# EAGLE board Ambulance (EAGLE 7.6.0)
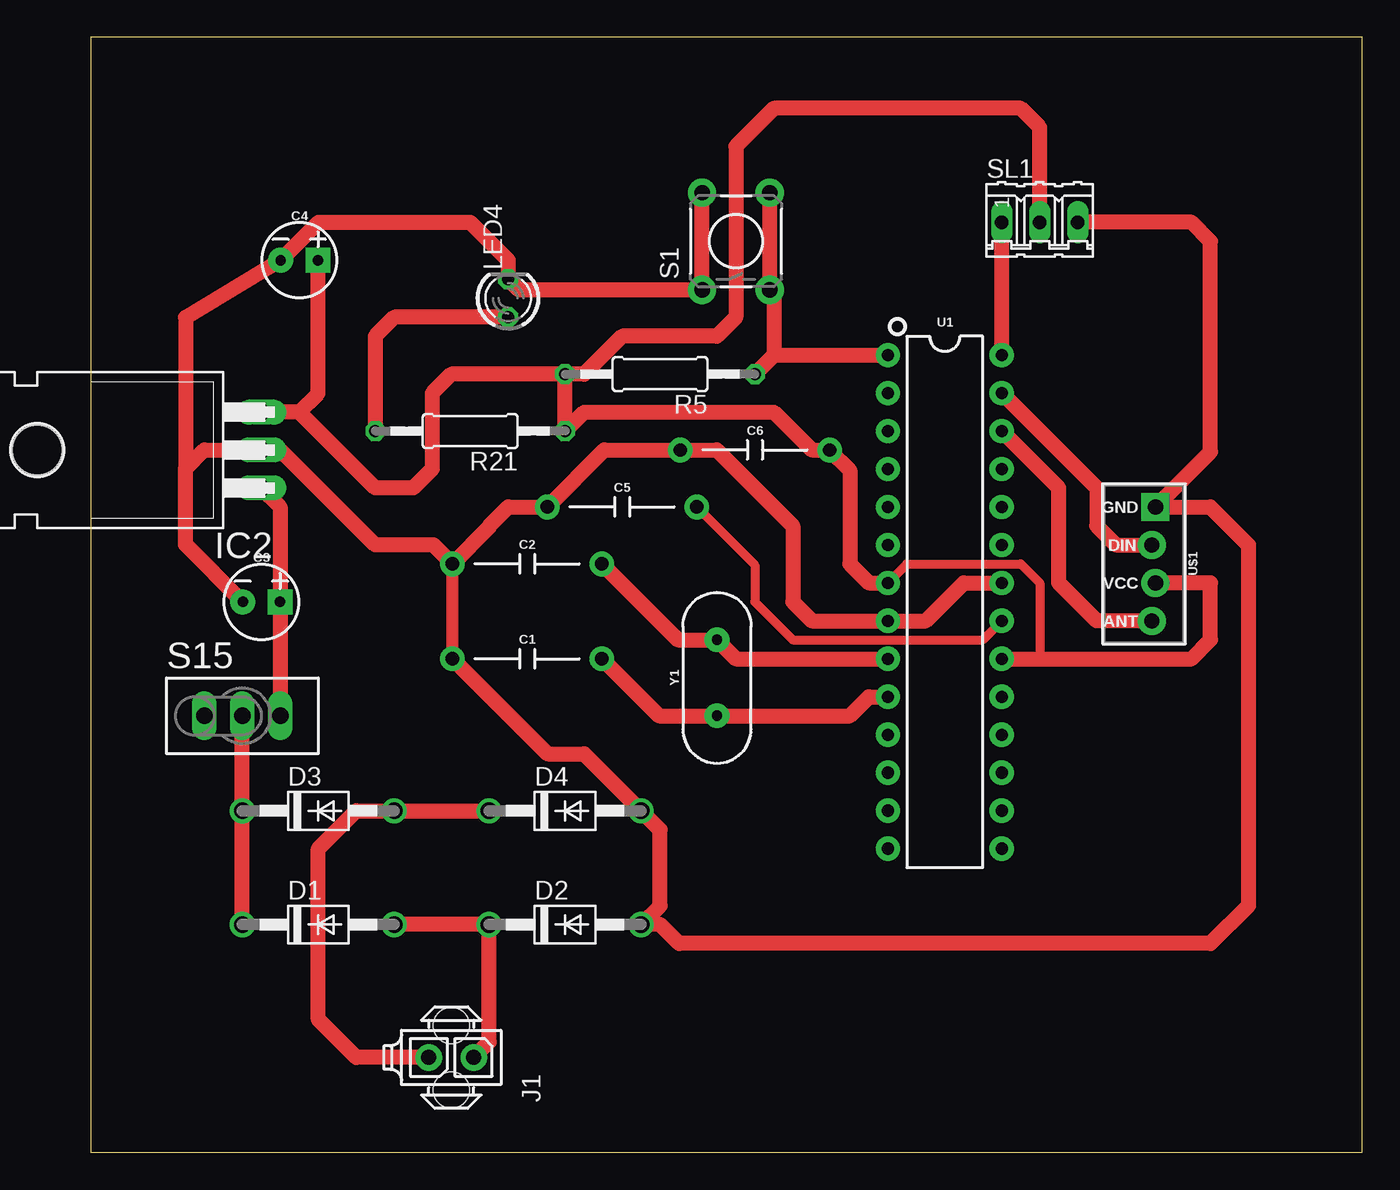
[diagram p0: board, top side]

Size 85.07 x 74.6 mm. Coordinates in mm from the lower left corner, seen from the top.
Outline: 0,0 85.07,0 85.07,74.6 0,74.6 0,0
Copper layers (1*16): Top 0.035mm / dielectric 1.5mm / Bottom 0.035mm
Design rules "default": minimum track width 10mil, minimum drill 24mil, track to track 8mil, track to pad 8mil, pad to pad 8mil, via to via 8mil, smd to smd 8mil, copper to edge 40mil, drill to drill 8mil, minimum pad ring 10mil, minimum via ring 8mil, stop-mask expansion 4mil, vias tented up to drill 0mil, thermal gap 10mil

## Footprints (pad centres in the part's own frame; a part is rotated, then mirrored left to right if it is on the bottom)
CAP-PTH-10MM = drill 0.9 pad 1.651: 1 -5,0; 2 5,0
CPOL-RADIAL-2.5MM-5MM-KIT = drill 0.7 pad 1.651 square: 1 1.25,0 | drill 0.7 pad 1.651: 2 -1.25,0
DO41-10 = drill 1.118: A 5.08,0; C -5.08,0
TO220H = drill 1.118 long: 1 -2.54,-10.16; 2 0,-10.16; 3 2.54,-10.16 | hole 3.302: 0,4.826
794681-2 = drill 1 pad 1.778: 1 0,-1.5; 2 0,1.5 | hole 2.4: 2.13,0; -2.17,0
LED3MM = drill 0.813 octagon: A -1.27,0; K 1.27,0
0207/12 = drill 0.813 octagon: 1 -6.35,0; 2 6.35,0
TACTILE-PTH = drill 1.016 pad 1.88: 1 -3.251,2.261; 2 3.251,2.261; 3 -3.251,-2.261; 4 3.251,-2.261
TL3XPO = drill 1.1 pad 1.422 long: 1 -2.54,0; 2 0,0; 3 2.54,0
03P = drill 0.914 long: 1 -2.54,0; 2 0,0; 3 2.54,0
DIP28 = drill 0.813 pad 1.626: 1 -16.51,-3.81; 2 -13.97,-3.81; 3 -11.43,-3.81; 4 -8.89,-3.81; 5 -6.35,-3.81; 6 -3.81,-3.81; 7 -1.27,-3.81; 8 1.27,-3.81; 9 3.81,-3.81; 10 6.35,-3.81; 11 8.89,-3.81; 12 11.43,-3.81; 13 13.97,-3.81; 14 16.51,-3.81; 15 16.51,3.81; 16 13.97,3.81; 17 11.43,3.81; 18 8.89,3.81; 19 6.35,3.81; 20 3.81,3.81; 21 1.27,3.81; 22 -1.27,3.81; 23 -3.81,3.81; 24 -6.35,3.81; 25 -8.89,3.81; 26 -11.43,3.81; 27 -13.97,3.81; 28 -16.51,3.81
RF-LINK_TX = drill 1.016 pad 1.88: ANT 3.81,-0.127; DATA -1.27,-0.127; VCC 1.27,0.127 | drill 1.016 pad 1.88 square: GND -3.81,0.127
HC49US = drill 0.7 pad 1.651: 1 -2.54,0; 2 2.54,0

## Placement (x,y rotation side)
C1  10nF  [CAP-PTH-10MM]  29.21,33.02 0 top
C2  10nF  [CAP-PTH-10MM]  29.21,39.37 0 top
C3  10uF  [CPOL-RADIAL-2.5MM-5MM-KIT]  11.43,36.83 0 top
C4  10uF  [CPOL-RADIAL-2.5MM-5MM-KIT]  13.97,59.69 0 top
C5  10nF  [CAP-PTH-10MM]  35.56,43.18 0 top
C6  10nF  [CAP-PTH-10MM]  44.45,46.99 0 top
D1  1N4004  [DO41-10]  15.24,15.24 0 top
D2  1N4004  [DO41-10]  31.75,15.24 0 top
D3  1N4004  [DO41-10]  15.24,22.86 0 top
D4  1N4004  [DO41-10]  31.75,22.86 0 top
IC2  7812T  [TO220H]  1.27,46.99 90 top
J1  794681-2  [794681-2]  24.13,6.35 90 top
LED4  TLLR4400  [LED3MM]  27.94,57.15 90 top
R5  [0207/12]  38.1,52.07 180 top
R21  [0207/12]  25.4,48.26 180 top
S1  [TACTILE-PTH]  43.18,60.96 90 top
S15  TL37PO  [TL3XPO]  10.16,29.21 0 top
SL1  [03P]  63.5,62.23 0 top
U1  328P  [DIP28]  57.15,36.83 270 top
U$1  RF-LINK_TX  [RF-LINK_TX]  71.12,39.37 270 top
Y1  16MHz  [HC49US]  41.91,31.75 90 top

## Library data of the parts
C1 C2 C5 C6 = SparkFun-Capacitors; PROD_ID: CAP-09321
C3 C4 = SparkFun-Capacitors; PROD_ID: CAP-08440
D1-D4 = diode
IC2 = linear
J1 = con-amp
LED4 = led; MF: VISHAY SEMICONDUCTOR; OC_FARNELL: 1612437
R5 R21 = rcl
S1 = SparkFun-Retired
S15 = switch
SL1 = con-amp-quick; OC_FARNELL: unknown; OC_NEWARK: unknown
U1 = SparkFun-IC-Microcontroller; PROD_ID: IC-09136
U$1 = SparkFun-RF; SF_ID: WRL-10534
Y1 = SparkFun-Clocks; PROD_ID: XTAL-08181; SF_ID: COM-00536

## Nets
5V: C4.1 C6.2 IC2.3 R5.2 R21.1 SL1.2 U1.7 U1.20 U$1.VCC
12V: D1.C D3.C S15.2
GND: C1.1 C2.1 C3.2 C4.2 C5.1 C6.1 D2.A D4.A IC2.2 LED4.K S1.1 S1.2 SL1.3 U1.8 U1.22 U$1.GND
N$1: SL1.1 U1.28
N$2: U1.27 U$1.DATA
N$3: C2.2 U1.9 Y1.2
N$4: C1.2 U1.10 Y1.1
N$5: LED4.A R21.2
N$6: C5.2 U1.21
N$7: U1.26 U$1.ANT
N$9: R5.1 S1.3 S1.4 U1.1
N$10: D3.A D4.C J1.2
N$11: C3.1 IC2.1 S15.3
N$50: D1.A D2.C J1.1

## Tracks (layer width: path | path; a pad name or v marks a point on that pad's centre or on a via)
5V
  Top 0.61: U1.7 54.61,39.37 62.23,39.37 63.5,38.1 63.5,33.02
  Top 1.016: R5.2 R21.1 33.02,49.53 45.72,49.53 48.26,46.99 C6.2 50.8,45.64 50.8,39.37 52.07,38.1 U1.7 | U1.20 63.5,33.02 73.66,33.02 74.93,34.29 74.93,38.1 U$1.VCC | SL1.2 63.5,68.58 62.23,69.85 45.72,69.85 43.18,67.31 43.18,55.88 41.91,54.61 35.56,54.61 33.02,52.07 R5.2 | R5.2 24.13,52.07 22.86,50.8 22.86,45.72 21.59,44.45 19.05,44.45 13.97,49.53 | 13.97,49.53 IC2.3 | 13.97,49.53 15.22,50.78 C4.1
12V
  Top 1.016: D1.C D3.C S15.2
GND
  Top 0.813: C1.1 C2.1
  Top 1.016: C3.2 6.35,40.66 6.35,45.72 | 6.35,45.72 7.62,46.99 IC2.2 12.7,46.99 19.05,40.64 22.94,40.64 C2.1 26.67,41.83 26.67,41.91 27.94,43.18 C5.1 34.37,46.99 C6.1 41.91,46.99 46.99,41.91 46.99,36.83 48.26,35.56 U1.8 55.88,35.56 58.42,38.1 U1.22 | 6.35,45.72 6.35,55.86 C4.2 15.26,62.23 25.4,62.23 27.94,59.69 LED4.K 28.65,57.71 S1.1 S1.2 | C1.1 30.56,26.67 33.02,26.67 D4.A 38.1,21.59 38.1,16.51 D2.A 38.1,15.24 39.37,13.97 74.93,13.97 77.47,16.51 77.47,40.64 74.93,43.18 U$1.GND 74.93,46.86 74.93,60.96 73.66,62.23 SL1.3
N$1
  Top 1.016: U1.28 SL1.1
N$2
  Top 1.016: U1.27 67.31,44.45 67.31,41.91 68.58,40.64 U$1.DATA
N$3
  Top 1.016: C2.2 39.29,34.29 Y1.2 43.18,33.02 U1.9
N$4
  Top 1.016: U1.10 52.07,30.48 50.8,29.21 Y1.1 38.02,29.21 C1.2
N$5
  Top 1.016: LED4.A 20.32,55.88 19.05,54.61 R21.2
N$6
  Top 0.61: C5.2 44.45,39.29 44.45,36.83 46.99,34.29 59.69,34.29 U1.21
N$7
  Top 1.016: U$1.ANT 67.31,35.56 64.77,38.1 64.77,44.45 U1.26
N$9
  Top 1.016: S1.4 S1.3 45.72,57.43 45.72,53.34 | R5.1 45.72,53.34 | 45.72,53.34 U1.1
N$10
  Top 1.016: J1.2 17.78,6.35 15.24,8.89 15.24,20.32 17.78,22.86 D3.A D4.C
N$11
  Top 1.016: S15.3 12.7,36.81 C3.1 12.68,43.2 IC2.1
N$50
  Top 1.016: J1.1 26.67,7.39 D2.C D1.A